# EAGLE board switch (EAGLE 6.5.0)
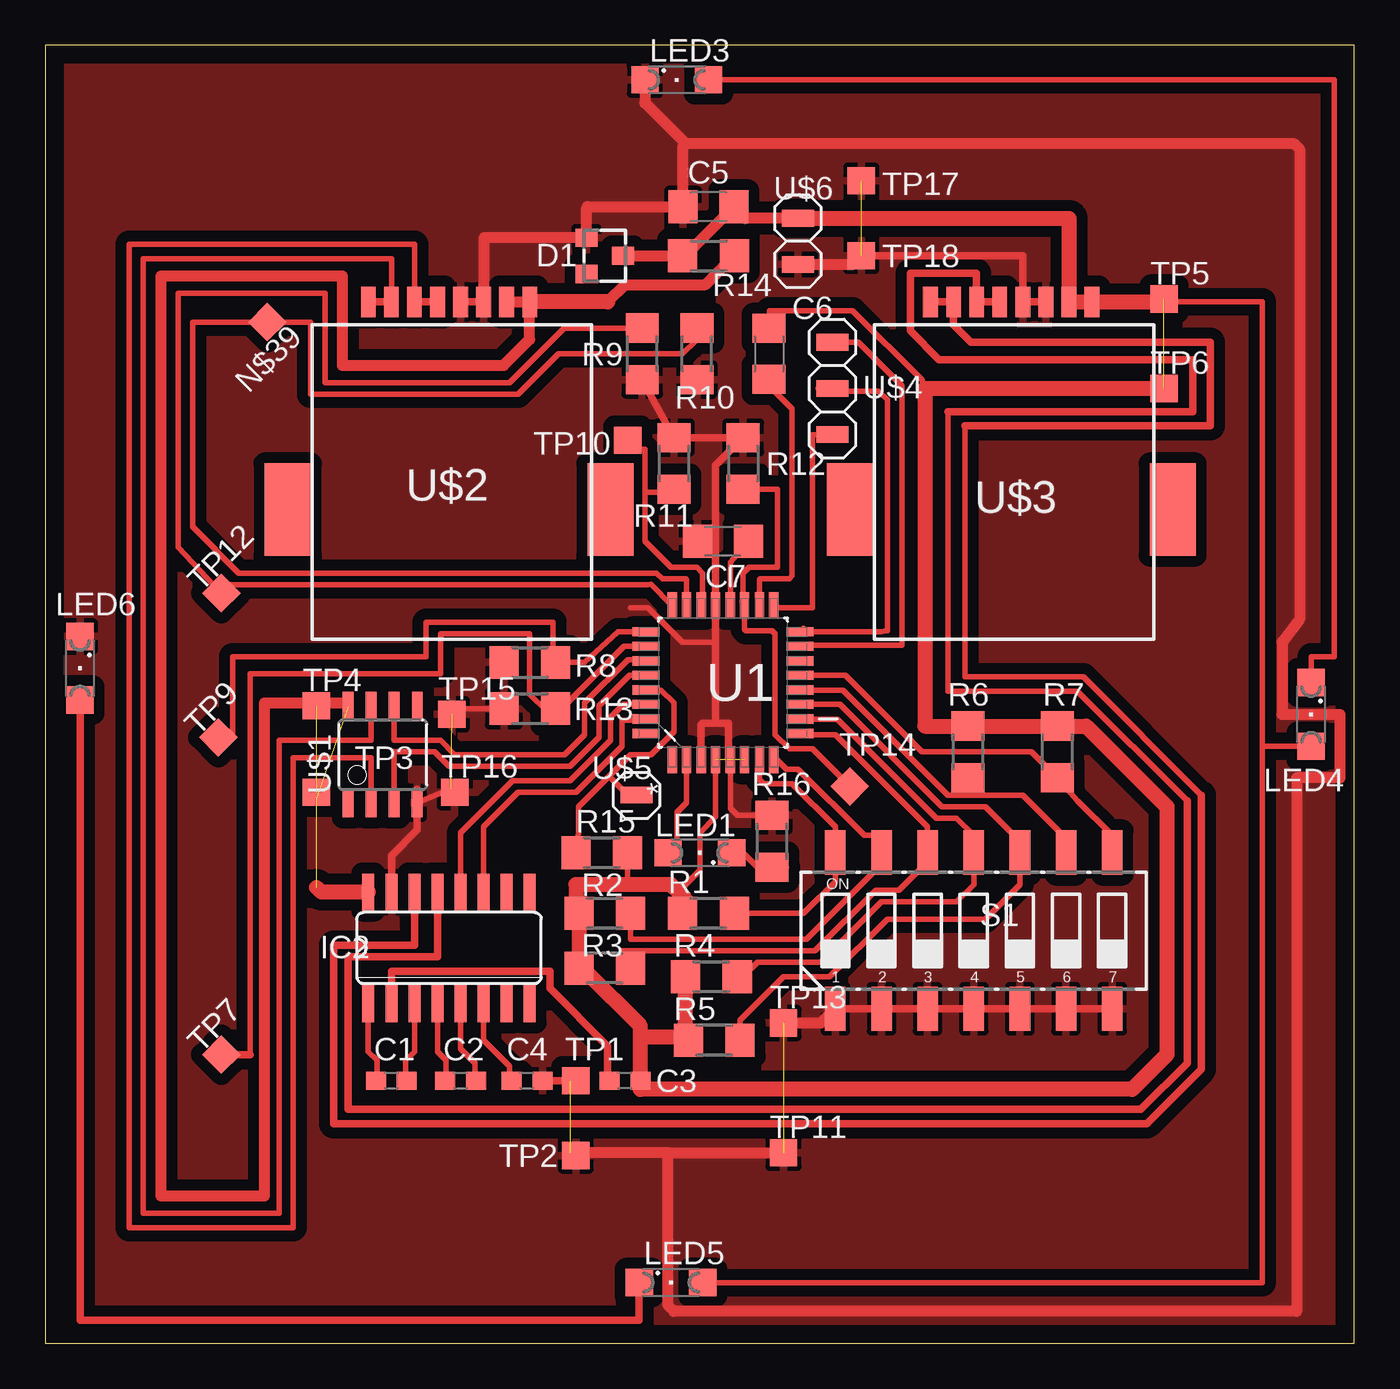
[diagram p0: board, top side]
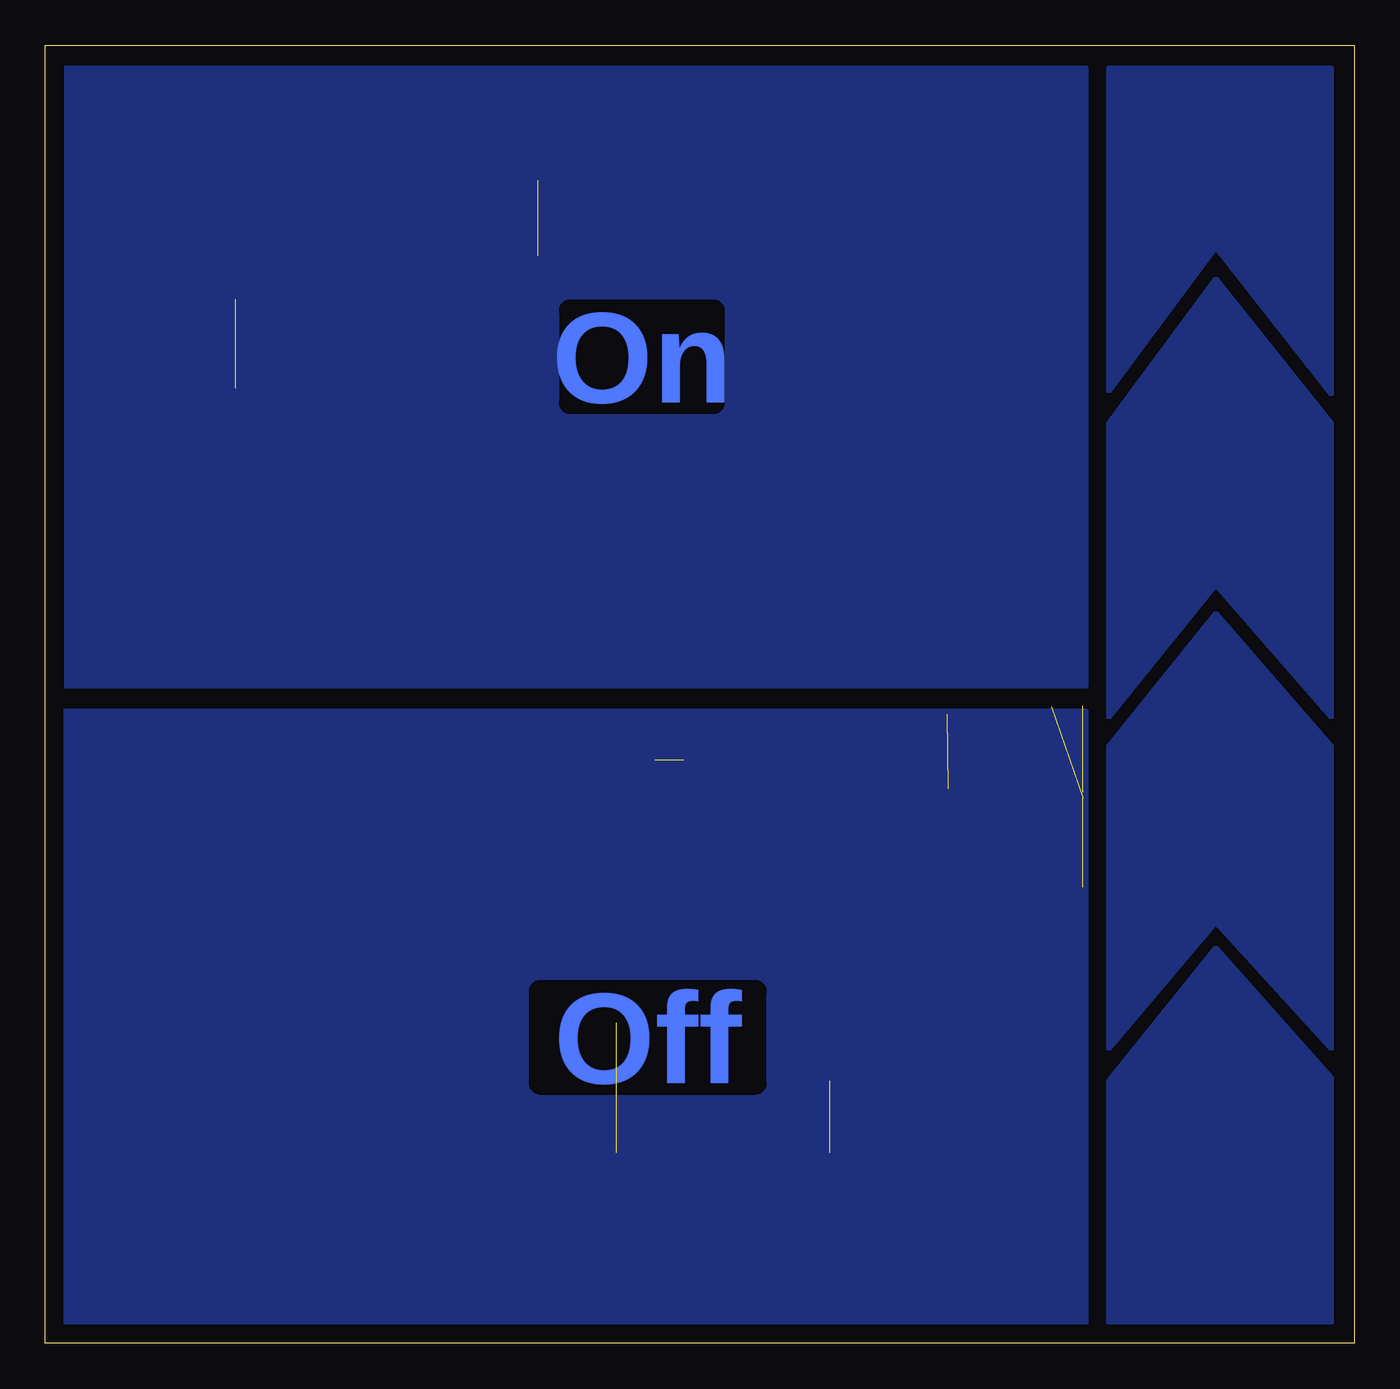
[diagram p1: board, bottom side, seen from below]

Size 72.06 x 71.43 mm. Coordinates in mm from the lower left corner, seen from the top.
Outline: 0,0 72.06,0 72.06,71.43 0,71.43 0,0
Copper layers (1*16): Top 0.035mm / dielectric 1.5mm / Bottom 0.035mm
Design rules "default": minimum track width 10mil, minimum drill 24mil, track to track 8mil, track to pad 8mil, pad to pad 8mil, via to via 8mil, smd to smd 8mil, copper to edge 40mil, drill to drill 8mil, minimum pad ring 10mil, minimum via ring 8mil, stop-mask expansion 4mil, vias tented up to drill 0mil, thermal gap 10mil

## Footprints (pad centres in the part's own frame; a part is rotated, then mirrored left to right if it is on the bottom)
C0603 = smd 1.1 x 1: 1 -0.85,0; 2 0.85,0
C1206 = smd 1.6 x 1.8: 1 -1.4,0; 2 1.4,0
TO236 = smd 1 x 1.2: A -1,-1; C 0,1; NC 1,-1
SO16 = smd 0.66 x 2.032: 1 -4.445,-3.073; 2 -3.175,-3.073; 3 -1.905,-3.073; 4 -0.635,-3.073; 5 0.635,-3.073; 6 1.905,-3.073; 7 3.175,-3.073; 8 4.445,-3.073; 9 4.445,3.073; 10 3.175,3.073; 11 1.905,3.073; 12 0.635,3.073; 13 -0.635,3.073; 14 -1.905,3.073; 15 -3.175,3.073; 16 -4.445,3.073
SML1206 = smd 1.5 x 1.5: A 1.75,0; C -1.75,0
TP15SQ = smd 1.5 x 1.5: TP 0,0
R1206 = smd 1.6 x 1.803: 1 -1.422,0; 2 1.422,0
CTS-219-07 = smd 1.13 x 2.44: 1 -7.62,-4.3; 2 -5.08,-4.3; 3 -2.54,-4.3; 4 0,-4.3; 5 2.54,-4.3; 6 5.08,-4.3; 7 7.62,-4.3; 8 7.62,4.3; 9 5.08,4.3; 10 2.54,4.3; 11 0,4.3; 12 -2.54,4.3; 13 -5.08,4.3; 14 -7.62,4.3
QFP80P900X900X120-32N = smd 1.473 x 0.508: 1 -4.242,2.794; 2 -4.242,2.007; 3 -4.242,1.194; 4 -4.242,0.406; 5 -4.242,-0.406; 6 -4.242,-1.194; 7 -4.242,-2.007; 8 -4.242,-2.794; 17 4.242,-2.794; 18 4.242,-2.007; 19 4.242,-1.194; 20 4.242,-0.406; 21 4.242,0.406; 22 4.242,1.194; 23 4.242,2.007; 24 4.242,2.794 | smd 0.508 x 1.473: 9 -2.794,-4.242; 10 -2.007,-4.242; 11 -1.194,-4.242; 12 -0.406,-4.242; 13 0.406,-4.242; 14 1.194,-4.242; 15 2.007,-4.242; 16 2.794,-4.242; 25 2.794,4.242; 26 2.007,4.242; 27 1.194,4.242; 28 0.406,4.242; 29 -0.406,4.242; 30 -1.194,4.242; 31 -2.007,4.242; 32 -2.794,4.242
P82B715SMD = smd 0.6 x 1.6: 1 -1.905,-2.654; 2 -0.645,-2.654; 3 0.625,-2.654; 4 1.895,-2.654; 5 1.905,2.654; 6 0.635,2.654; 7 -0.635,2.654; 8 -1.905,2.654
RJ45SMD = smd 0.813 x 1.676: P$1 -4.445,8.255; P$2 -3.175,8.255; P$3 -1.905,8.255; P$4 -0.635,8.255; P$5 0.635,8.255; P$6 1.905,8.255; P$7 3.175,8.255; P$8 4.445,8.255 | smd 2.54 x 5.08: P$9 8.89,-3.175; P$10 -8.89,-3.175
1X03SMD = smd 0.914 x 1.778: P$1 -2.54,0; P$2 0,0; P$3 2.54,0
1X01SMD = smd 0.914 x 1.778: P$1 0,0
1X02SMD = smd 0.914 x 1.778: P$1 0,0; P$2 2.54,0

## Placement (x,y rotation side)
C1  [C0603]  19.05,14.45 0 top
C2  [C0603]  22.86,14.45 0 top
C3  [C0603]  31.91,14.45 180 top
C4  [C0603]  26.51,14.45 0 top
C5  [C1206]  36.51,62.55 180 top
C6  [C1206]  39.85,54.45 270 top
C7  [C1206]  37.31,44.13 180 top
D1  BZX84CSMD  [TO236]  30.8,59.85 270 top
IC2  MAX3232CSE  [SO16]  22.23,21.75 0 top
LED1  [SML1206]  36.04,26.99 180 top
LED3  [SML1206]  34.77,69.53 0 top
LED4  [SML1206]  69.69,34.61 270 top
LED5  [SML1206]  34.45,3.33 0 top
LED6  [SML1206]  1.91,37.15 270 top
N$39  TPSQTP15SQ  [TP15SQ]  12.22,56.2 225 top
R1  [R1206]  36.51,23.65 0 top
R2  [R1206]  30.8,23.65 0 top
R3  [R1206]  30.8,20.64 0 top
R4  [R1206]  36.67,20.16 0 top
R5  [R1206]  36.83,16.67 0 top
R6  [R1206]  50.8,32.54 270 top
R7  [R1206]  55.72,32.54 270 top
R8  [R1206]  26.67,37.47 180 top
R9  [R1206]  32.86,54.45 270 top
R10  [R1206]  35.88,54.45 270 top
R11  [R1206]  34.61,48.42 90 top
R12  [R1206]  38.42,48.42 90 top
R13  [R1206]  26.67,34.92 180 top
R14  [R1206]  36.51,59.85 180 top
R15  [R1206]  30.64,26.99 0 top
R16  [R1206]  40.01,27.62 90 top
S1  219-07  [CTS-219-07]  51.12,22.7 0 top
TP1  TPSQTP15SQ  [TP15SQ]  29.21,14.45 0 top
TP2  TPSQTP15SQ  [TP15SQ]  29.21,10.32 0 top
TP3  TPSQTP15SQ  [TP15SQ]  14.92,30.32 0 top
TP4  TPSQTP15SQ  [TP15SQ]  14.92,35.08 0 top
TP5  TPSQTP15SQ  [TP15SQ]  61.59,57.47 0 top
TP6  TPSQTP15SQ  [TP15SQ]  61.59,52.55 0 top
TP7  TPSQTP15SQ  [TP15SQ]  9.68,15.88 45 top
TP9  TPSQTP15SQ  [TP15SQ]  9.53,33.34 45 top
TP10  TPSQTP15SQ  [TP15SQ]  32.07,49.69 0 top
TP11  TPSQTP15SQ  [TP15SQ]  40.64,10.48 0 top
TP12  TPSQTP15SQ  [TP15SQ]  9.68,41.27 45 top
TP13  TPSQTP15SQ  [TP15SQ]  40.64,17.62 0 top
TP14  TPSQTP15SQ  [TP15SQ]  44.29,30.64 225 top
TP15  TPSQTP15SQ  [TP15SQ]  22.38,34.61 0 top
TP16  TPSQTP15SQ  [TP15SQ]  22.54,30.32 0 top
TP17  TPSQTP15SQ  [TP15SQ]  44.93,63.98 0 top
TP18  TPSQTP15SQ  [TP15SQ]  44.93,59.85 0 top
U1  ATMEGA48-20AU  [QFP80P900X900X120-32N]  37.31,36.35 90 top
U$1  P82B715  [P82B715SMD]  18.57,32.38 0 top
U$2  RJ45SMD  [RJ45SMD]  22.23,49.05 0 top
U$3  RJ45SMD  [RJ45SMD]  53.18,49.05 0 top
U$4  [1X03SMD]  43.34,52.55 90 top
U$5  PINHD-1X1SMD  [1X01SMD]  32.54,30.16 90 top
U$6  PINHD-1X2SMD  [1X02SMD]  41.43,61.91 270 top

## Library data of the parts
C1-C7 R1-R16 = rcl
D1 = diode
IC2 = maxim; MPN: MAX3232CSE; OC_FARNELL: 9725490; OC_NEWARK: 90C2890
LED1 LED3-LED6 = led
N$39 TP1-TP7 TP9-TP18 = testpad
S1 = switch-dil; OC_FARNELL: unknown; OC_NEWARK: unknown
U1 = atmega48; MPN: ATMEGA48-20AU; OC_FARNELL: 9171312; OC_NEWARK: 73K2002; PACKAGE: TQFP-32; SUPPLIER: Aymel
U$1 = i2c
U$2 U$3 = con-tycoelectronics
U$4-U$6 = pinhead

## Nets
+12V: IC2.16 R14.1 U$1.8 U$2.P$7 U$2.P$8
GND: C4.2 C5.2 C7.2 D1.A IC2.15 LED3.C LED6.C R8.2 R9.2 R10.2 R11.2 R12.2 R13.2 R16.2 S1.1 S1.2 S1.3 S1.4 S1.5 S1.6 S1.7 TP2.TP TP11.TP TP13.TP TP15.TP TP16.TP TP17.TP TP18.TP U1.3 U1.5 U1.21 U$1.4 U$2.P$5 U$2.P$6 U$3.P$5 U$3.P$6 U$6.P$2
N$1: U1.28 U$1.3
N$2: U1.27 U$1.6
N$3: R1.2 S1.14 U1.7
N$4: R7.2 S1.8 U1.13
N$5: R6.2 S1.9 U1.12
N$6: R5.2 S1.10 U1.11
N$7: R4.2 S1.11 U1.10
N$8: R3.2 S1.12 U1.9
N$9: R2.2 S1.13 U1.8
N$10: IC2.11 U1.31
N$11: IC2.12 U1.30
N$12: U$1.7 U$2.P$1 U$2.P$2
N$13: U$1.2 U$2.P$3 U$2.P$4
N$14: R12.1 TP14.TP U1.19
N$15: R11.1 TP10.TP U1.22
N$16: N$39.TP R10.1 U1.23
N$17: R9.1 TP12.TP U1.24
N$18: R8.1 TP9.TP U1.25
N$19: R13.1 TP7.TP U1.26
N$20: C1.1 IC2.1
N$21: C3.1 C5.1 C6.1 D1.C LED4.A LED5.A R1.1 R2.1 R3.1 R4.1 R5.1 R6.1 R7.1 R14.2 R15.2 TP5.TP TP6.TP U1.4 U1.6 U$3.P$7 U$3.P$8 U$6.P$1
N$22: C1.2 IC2.3
N$23: IC2.14 U$3.P$1 U$3.P$2
N$24: IC2.13 U$3.P$3 U$3.P$4
N$25: C2.1 IC2.4
N$26: C2.2 IC2.5
N$27: C3.2 IC2.2
N$28: C4.1 IC2.6
N$29: U1.17 U$4.P$1
N$30: U1.16 U$4.P$2
N$31: U1.15 U$4.P$3
N$32: R15.1 U1.29 U$5.P$1
N$33: LED1.C R16.1
N$34: C6.2 U1.18
N$35: LED1.A U1.2
N$36: C7.1 U1.20
N$37: LED3.A LED4.C
N$38: LED5.C LED6.A
VCC: TP3.TP TP4.TP

## Tracks (layer width: path | path; a pad name or v marks a point on that pad's centre or on a via)
+12V  (2 unrouted)
  Top 0.61: 30.96,57.31 31.91,58.26 36.35,58.26 R14.1 | U$2.P$7 U$2.P$8 26.67,55.25 25.24,53.82 16.35,53.82 16.35,58.74 6.35,58.74 6.35,8.1 12.07,8.1 12.07,35.24 16.62,35.24 U$1.8
  Top 0.813: 30.96,57.31 U$2.P$8 | IC2.16 15.18,24.82 14.92,25.08
GND  (4 unrouted)
  Top 0.305: 32.23,40.48 33.18,40.48 35.08,38.58 36.9,38.58 | U1.5 37.71,29.44 38.1,29.05 R16.2 | R13.2 22.86,34.93 TP15.TP | U$1.4 22.34,30.53 TP16.TP | C7.2 36.9,44.13
  Top 0.406: R9.2 R11.2 R12.2 36.9,48.32 36.9,44.13 U1.21 36.9,38.58 36.9,34.22 | S1.1 S1.2 S1.3 S1.4 S1.5 S1.6 S1.7 | 20.48,30.48 20.48,28.26 19.05,26.83 IC2.15 | U$2.P$5 U$2.P$6 | U$3.P$6 U$3.P$5 53.82,59.85 TP18.TP | C4.2 28.89,14.45 | 36.9,34.22 36.99,34.13 37.62,34.13 37.62,32.2 U1.5 | U1.3 36.11,34.05 36.19,34.13 36.81,34.13 36.9,34.22
  Top 0.61: 35.24,66.04 35.11,65.91 C5.2 29.84,62.55 29.8,62.5 D1.A 24.18,60.85 24.13,60.8 U$2.P$6 | 35.24,66.04 68.74,66.04 69.06,65.72 69.06,39.85 68.1,38.58 68.1,34.61 71.28,34.61 71.28,31.12 68.9,31.12 68.9,1.75 34.61,1.75 34.29,2.06 34.29,10.48 | 34.29,10.48 28.89,10.48 | 34.29,10.48 TP11.TP | TP13.TP 42.72,17.62 S1.1 | U$6.P$2 44.45,59.37 TP18.TP | LED3.C 33.02,68.27 35.24,66.04
  pour Top (isolate 0.61): 0.16,71.28 71.91,71.28 71.91,0.16 0.16,0.16
N$1
  Top 0.305: U1.28 32.16,36.76 30.48,35.08 30.48,33.34 28.89,31.75 22.23,31.75 21.43,32.54 19.21,32.54 19.21,30.53 U$1.3
N$2
  Top 0.305: U$1.6 19.21,33.18 21.75,33.18 22.54,32.39 28.57,32.39 29.69,33.5 29.69,35.24 32.07,37.62 32.99,37.62 U1.27
N$3
  Top 0.305: U1.7 39.31,31.01 39.53,30.8 41.12,30.8 43.5,28.42 S1.14 43.5,25.4 41.75,23.65 R1.2
N$4
  Top 0.305: U1.13 44.04,36.76 48.26,32.54 54.3,32.54 R7.2 56.83,29.85 58.74,27.94 S1.8
N$5
  Top 0.305: 55.88,27.78 55.88,28.1 53.82,30.16 50.8,30.16 | U1.12 43.9,35.95 49.69,30.16 50.8,30.16 | R6.2 50.8,30.16
  Top 0.406: 55.88,27.78 55.88,27.32 S1.9
N$6
  Top 0.305: U1.11 43.74,35.16 49.37,29.53 51.75,29.53 53.66,27.62 S1.10 53.66,25.24 51.75,23.34 46.36,23.34 43.18,20.16 40.64,20.16 38.25,17.77 38.25,17.46
  Top 0.406: R5.2 38.25,17.46
N$7
  Top 0.305: U1.10 43.6,34.35 49.05,28.89 50.16,28.89 51.12,27.94 S1.11 51.12,25.24 50.16,24.29 46.04,24.29 42.7,20.96 39.21,20.96 38.26,20 38.26,19.84
  Top 0.406: R4.2 38.26,19.84
N$8
  Top 0.305: U1.9 41.61,33.5 43.5,33.5 48.58,28.42 S1.12 | 31.75,20.48 31.75,21.59 42.39,21.59 45.72,24.92 46.99,24.92 48.26,26.19
  Top 0.406: 48.26,27.78 S1.12 48.26,26.19 | R3.2 31.75,20.48
N$9
  Top 0.305: R2.2 32.22,22.87 32.23,22.86 32.23,22.23 41.91,22.23 45.88,26.19 45.88,26.84 S1.13 46.04,27.94 45.09,27.94 41.43,31.59 40.8,31.59 40.28,32.11 U1.8
N$10
  Top 0.305: U1.31 33.01,34.29 31.75,34.29 31.75,32.86 29.21,30.32 26.03,30.32 24.13,28.42 IC2.11
N$11
  Top 0.305: U1.30 31.83,35.16 31.12,34.45 31.12,33.18 28.89,30.96 25.72,30.96 22.86,28.1 IC2.12
N$12
  Top 0.305: U$2.P$2 19.05,59.69 5.4,59.69 5.4,7.14 12.86,7.14 12.86,33.18 17.94,33.18 U$1.7
  Top 0.406: U$2.P$2 U$2.P$1
N$13
  Top 0.305: U$2.P$3 20.32,60.48 4.6,60.48 4.6,6.35 13.65,6.35 13.65,32.23 17.93,32.23 U$1.2
  Top 0.406: U$2.P$4 U$2.P$3
N$14
  Top 0.305: TP14.TP 42.23,32.7 40.96,32.7 40.16,33.5 40.16,39.05 40.01,39.21 38.58,39.21 38.5,39.29 U1.19 38.42,40.68 38.42,42.39 38.73,42.7 40.32,42.7 40.32,46.99 38.58,46.99 R12.1
  Top 0.406: 38.42,40.83 U1.19
N$15
  Top 0.305: TP10.TP 32.54,49.21 33.02,49.21 33.02,46.83 | 33.02,46.83 33.02,44.13 34.45,42.7 35.88,42.7 36.19,42.39 36.19,40.68 U1.22 | R11.1 35.08,46.83 33.02,46.83
N$16
  Top 0.305: 35.24,40.65 U1.23 35.3,42.01 35.24,42.07 33.97,42.07 33.66,42.39 10.64,42.39 8.1,44.93 8.1,56.2 N$39.TP 14.6,56.2 14.6,52.23 26.03,52.23 28.26,54.45 35.08,54.45 35.87,55.24 R10.1
N$17
  Top 0.305: U1.24 33.34,41.77 33.16,41.75 10.16,41.75 TP12.TP 7.3,43.82 7.3,57.79 15.4,57.79 15.4,52.86 25.56,52.86 28.57,55.87 R9.1 32.54,55.87
N$18
  Top 0.305: U1.25 31.53,39.15 29.69,37.47 R8.1 | 27.94,37.47 27.94,39.69 20.96,39.69 20.96,37.78 10.32,37.78 10.32,33.34 TP9.TP
  Top 0.406: 27.94,37.47 R8.1
N$19
  Top 0.305: R13.1 28.42,34.93 31.85,38.36 U1.26 | 11.27,15.88 11.27,36.83 21.75,36.83 21.75,39.05 26.67,39.05 26.67,35.72 27.62,34.77
  Top 0.406: R13.1 27.78,34.93 27.62,34.77 | 11.27,15.88 TP7.TP
N$20
  Top 0.305: IC2.1 17.78,16.03 18.26,15.56 18.26,14.5 C1.1
N$21  (3 unrouted)
  Top 0.305: 57,34.13 R7.1 | 36.9,32.01 36.9,28.96 36.04,28.1 36.04,26.03 34.85,24.84 | R15.2 32.06,25.23 32.07,25.24 | U$6.P$1 41.91,61.6 41.75,61.91 | LED4.A 66.99,32.86 | 66.99,32.86 66.99,57.31 61.59,57.31 | LED5.A 66.99,3.33 66.99,32.86 | C6.1 39.87,56.83 44.45,56.83 48.26,53.02 48.42,52.55
  Top 0.406: 36.9,32.01 U1.4 | 57.32,33.97 57.62,33.97 | 35.24,16.83 R5.1
  Top 0.61: D1.C R14.2 35.53,59.97 35.53,60.17 C5.1 38.55,61.91 41.75,61.91
  Top 0.813: R6.1 R7.1 | R7.1 57.32,33.97 61.75,29.53 61.75,15.88 59.85,13.97 32.76,13.97 C3.1 32.76,17.46 | R4.1 35.24,20 35.24,16.83 32.77,16.83 32.76,17.46 | 32.76,17.46 29.69,20.53 R3.1 R2.1 29.21,24.3 29.21,25.24 32.07,25.24 34.45,25.24 34.85,24.84 35.24,24.45 R1.1 | 41.75,61.91 56.36,61.91 U$3.P$7 U$3.P$8 61.59,57.31 | R7.1 48.42,33.97 48.42,52.55 TP6.TP
N$22
  Top 0.305: IC2.3 20.32,16.03 19.84,15.56 19.84,14.5 C1.2
N$23
  Top 0.305: 63.66,30.16 57.15,36.67 50.64,36.67 50.64,50.48
  Top 0.406: U$3.P$1 U$3.P$2 50.01,56.04 50.96,55.09 64.13,55.09 64.13,50.48 50.64,50.48 | 63.66,30.16 63.66,15.08 60.64,12.07 15.87,12.07 15.87,21.91 20.32,21.91 IC2.14
N$24
  Top 0.305: 62.87,29.85 56.83,35.88 49.69,35.88 49.69,51.28
  Top 0.406: U$3.P$4 U$3.P$3 51.28,58.9 47.62,58.9 47.62,55.72 49.21,54.13 63.02,54.13 63.18,53.98 | 62.87,29.85 62.87,15.4 60.33,12.86 16.67,12.86 16.67,21.27 21.59,21.27 IC2.13 | 49.69,51.28 63.18,51.28 63.18,53.98 | 63.18,53.98 63.18,54.13
N$25
  Top 0.305: IC2.4 21.59,16.03 22.07,15.56 22.07,14.5 C2.1
N$26
  Top 0.305: IC2.5 22.86,16.19 23.65,15.4 23.65,14.5 C2.2
N$27
  Top 0.406: C3.2 30.96,14.55 30.96,16.35 27.78,19.53 27.78,20.48 19.05,20.48 IC2.2
N$28
  Top 0.305: IC2.6 24.13,16.67 25.56,15.24 25.56,14.55 C4.1
N$29
  Top 0.305: U1.17 40.21,40.48 42.23,40.48 42.23,50.01 U$4.P$1
N$30
  Top 0.305: U$4.P$2 42.55,52.55 42.7,52.39 45.88,52.39 46.36,51.91 46.36,39.21 45.97,39.15 U1.16 41.75,39.35
N$31
  Top 0.305: U1.15 41.61,38.42 47.15,38.42 47.15,52.71 44.77,55.09 U$4.P$3
N$32
  Top 0.305: U1.29 33.9,35.95 34.61,35.24 34.61,33.66 33.34,32.39 32.23,32.39 31.04,31.19 | 31.04,31.19 29.37,29.53 29.37,28.11 R15.1 | U$5.P$1 32.07,30.16 31.04,31.19
N$33
  Top 0.305: LED1.C 38.42,26.99 39.21,26.19 40.79,26.19 R16.1
N$34
  Top 0.305: U1.18 39.31,42.01 39.37,42.07 40.96,42.07 41.12,42.23 41.12,51.44 39.85,52.71 C6.2
N$35
  Top 0.305: U1.2 35.3,29.74 34.77,29.21 34.77,26.99 LED1.A
N$36
  Top 0.305: C7.1 37.71,42.98 U1.20
N$37
  Top 0.305: LED3.A 70.96,69.53 70.96,37.78 69.69,37.78 LED4.C
N$38
  Top 0.406: LED6.A 1.91,1.27 32.7,1.27 LED5.C
N$39
  pour Bottom (isolate 0.61): 1.27,34.45 1.27,50.64 7.62,58.58 13.49,50.64 13.49,34.45 7.62,41.75
  pour Bottom (isolate 0.61): 1.27,52.23 1.27,70.17 13.49,70.17 13.49,52.39 7.62,60.33
N$40
  pour Bottom (isolate 0.61): 14.76,70.17 14.76,36.2 71.44,36.2 71.44,70.17
N$41
  pour Bottom (isolate 0.61): 1.27,16.19 1.27,32.86 7.62,40.16 13.49,32.86 13.49,16.19 7.62,23.18
N$42
  pour Bottom (isolate 0.61): 14.76,34.77 14.76,0.95 71.6,0.95 71.44,34.77
N$43
  pour Bottom (isolate 0.61): 1.27,1.11 1.27,14.61 7.62,21.75 13.49,14.45 13.49,1.11
VCC  (1 unrouted)
  Top 0.813: TP4.TP 14.76,35.08 14.76,35.4

## Text on the board
Bottom: On | Off